# Altium PCB FPGA1394-QLA-Test.PcbDoc
Units mil, origin at the board's own origin, x right, y up, seen from the top; angles counter-clockwise.
Board outline 5000 x 5950 mil, 2 copper layers (Top Layer, Bottom Layer); 24 components, 62 nets, 220 pads, 7 vias.
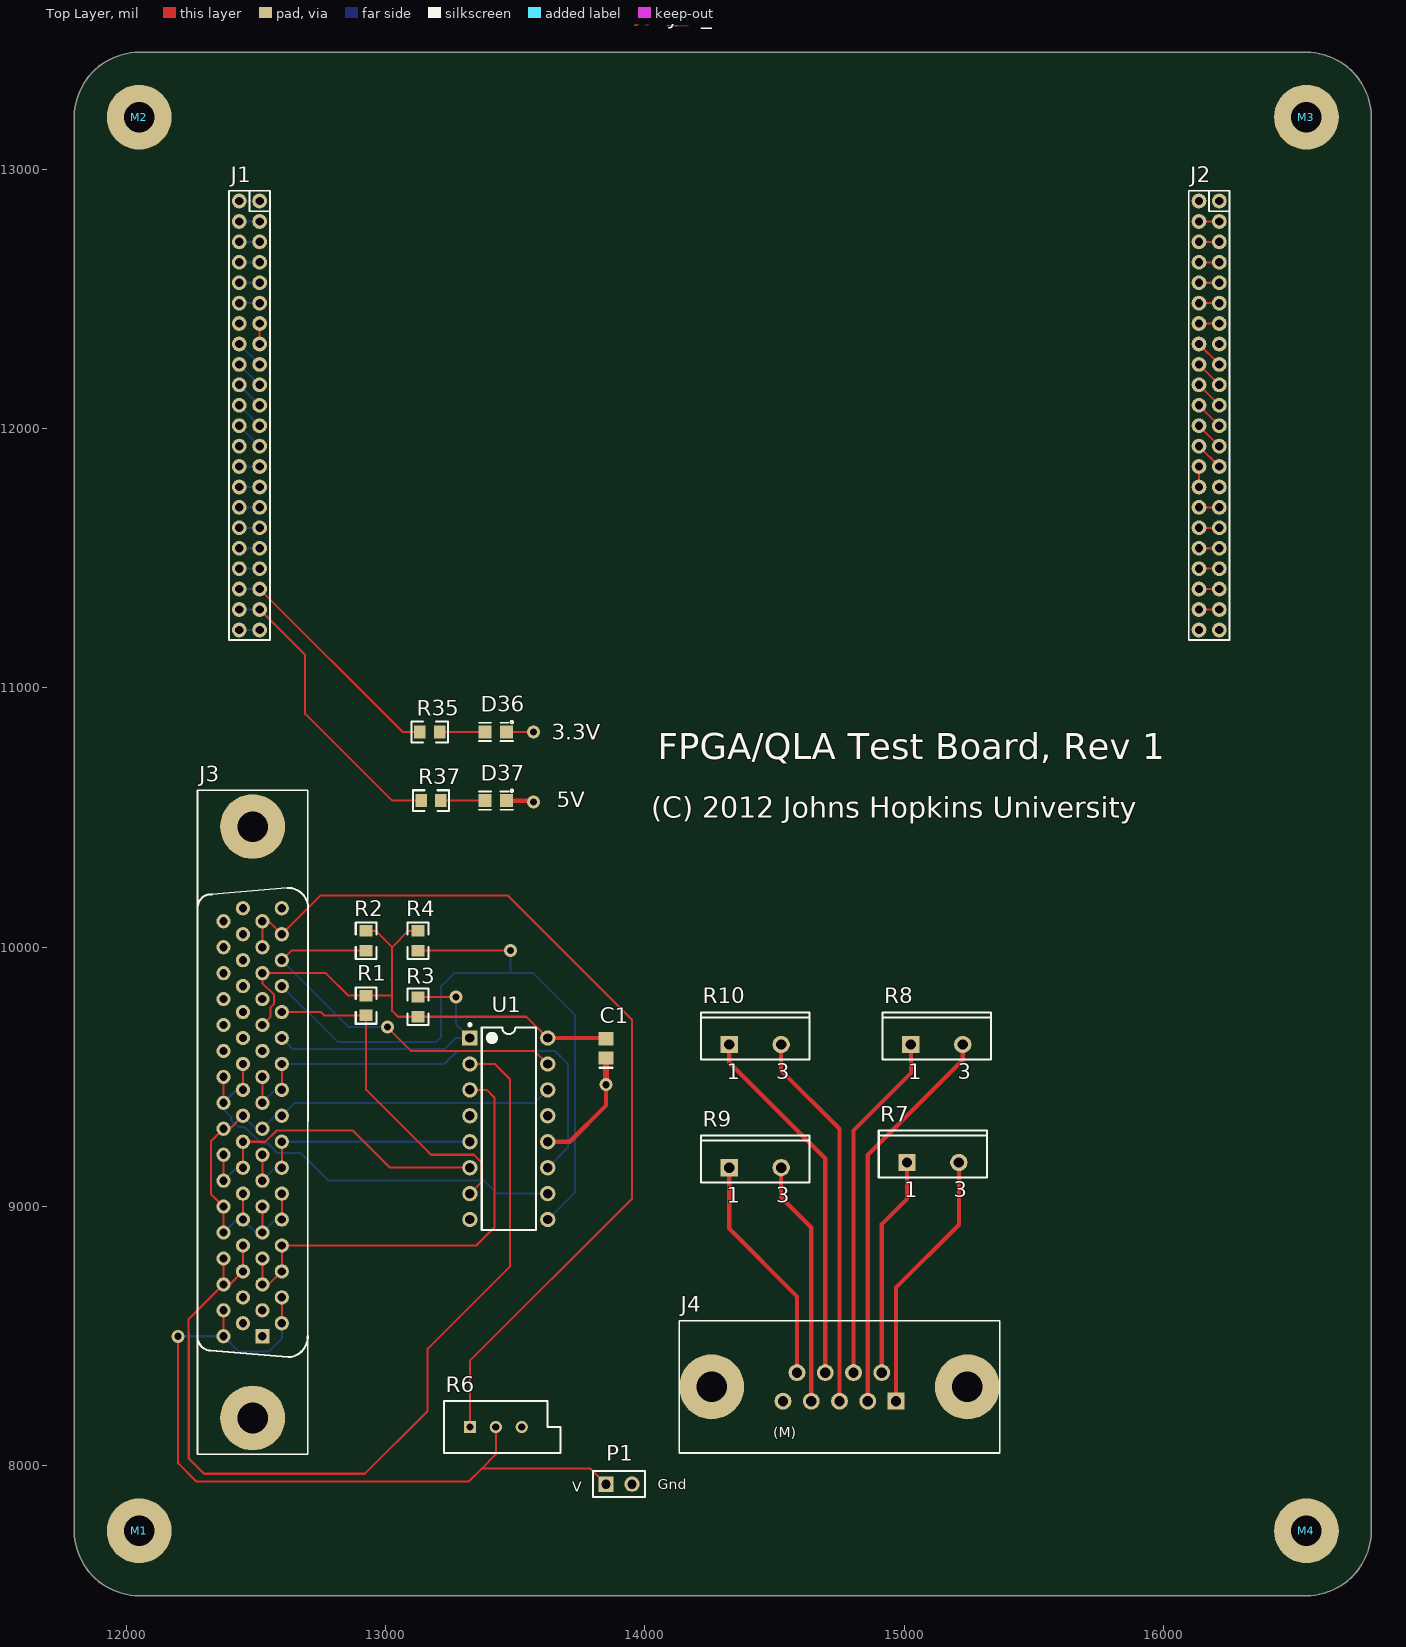
[diagram p0: Top Layer view]
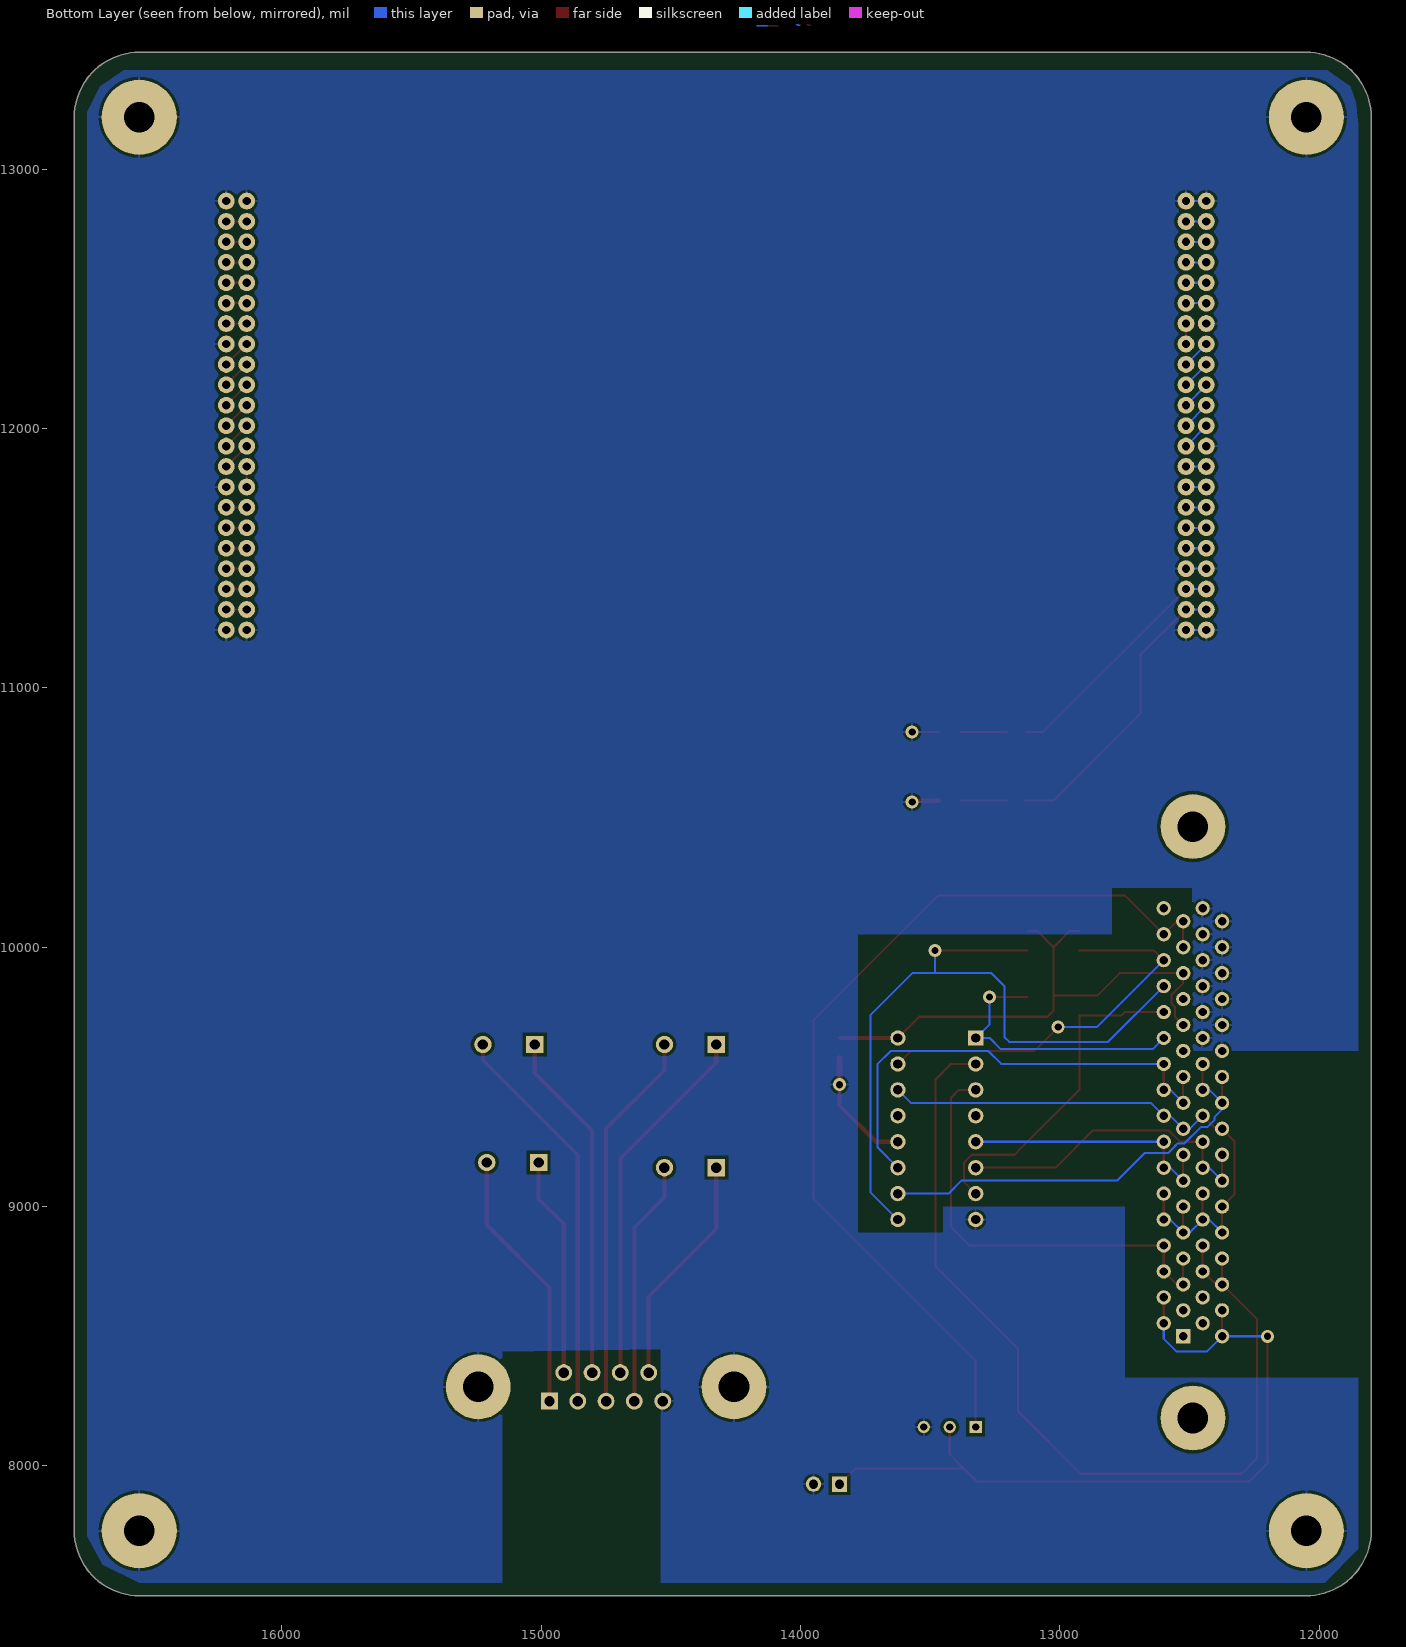
[diagram p1: Bottom Layer view, seen from below]

## Layer stack, top to bottom
Top Layer: signal copper 1.4
Dielectric: dielectric 12.6, FR-4, Dk 4.8
Bottom Layer: signal copper 1.4

## Board outline
11800,7750 ccw(c12050,7750) 12050,7500 16550,7500 ccw(c16550,7750) 16800,7750 16800,13200 ccw(c16550,13200) 16550,13450 12050,13450 ccw(c12050,13200) 11800,13200

## Design rules (kind name [scope] priority, off if disabled: settings)
Clearance [All] p1: gap=12
HoleSize [All] p1: absolutevalues=TRUE maxlimit=120 minlimit=1 maxpercent=80.000 minpercent=20.000
MinimumSolderMaskSliver [All] p1 off: minsoldermaskwidth=10
PolygonConnect [All] p1: connectstyle=Relief reliefconductorwidth=10 reliefentries=4 polygonreliefangle="90 Angle" airgapwidth=10
RoutingVias [All] p1: holewidth=28 width=50 viastyle="Through Hole" minholewidth=28 minwidth=50 maxholewidth=28 maxwidth=50
SilkscreenOverComponentPads [All] p1 off: minsilkscreentomaskgap=10
SolderMaskExpansion [All] p1: expansion=4
Width [All] p1: maxlimit=50 minlimit=8 preferedwidth=16
25 further rules are at their usual default settings.

## Classes and differential pairs
component class FPGA1394-Test: D36 D37 J1 J2 R35 R37
component class QLA-Test: C1 J3 J4 M1 M2 M3 M4 P1 R1 R2 R3 R4 R6 R7 R8 R9 R10 U1

## Components (designator, comment, footprint, x,y, rotation, side; value= is the part's Value field where it differs from the comment)
C1 "C0805" 0805 13850,9610 r90 top
D36 "LED" LED-0805 13425,10830 r180 top
D37 "LED" LED-0805 13425,10565 r180 top
J1 "HEADER 22x2-1" HDR-22x2-2MM 12475,12050 r270 top
J2 "HEADER 22x2-1" HDR-22x2-2MM 16175,12050 r270 top
J3 "HPDB68" HPDB68FV 12487.5,9325 r270 top
J4 "Motors (M)" DB9M 14750,8305 r0 top
M1 "MHOLE" MHOLE4 12050,7750 r0 top
M2 "MHOLE" MHOLE4 12050,13200 r0 top
M3 "MHOLE" MHOLE4 16550,13200 r0 top
M4 "MHOLE" MHOLE4 16550,7750 r0 top
P1 "Pot-Out" HDR1X2 13850,7930 r0 top
R1 "10k" R0805 12925,9775 r270 top
R2 "10k" R0805 12925,10025 r270 top
R3 "10k" R0805 13125,9770 r90 top
R4 "10k" R0805 13125,10025 r270 top
R6 "RPot" VR5 13425,8150 r0 top
R7 "50" TO-220AC 15110,9170 r0 top
R8 "50" TO-220AC 15125,9625 r0 top
R9 "50" TO-220AC 14425,9150 r0 top
R10 "50" TO-220AC 14425,9625 r0 top
R35 "200" R0805 13170,10830 r0 top
R37 "300" R0805 13175,10565 r0 top
U1 "DS96172CN" N16E 13475,9300 r0 top

## Footprints (in the part's own frame and the unit in brackets; to place one, negate y for a bottom-side part, rotate by r counter-clockwise, add the part's x,y. Pads: shape width x height; smd on the part's side, far side on the other; paste and mask are expansions set on the pad)
0805 [mm] "Chip Capacitor; Body 2.0 x 1.2 mm (LxW typ)"
  rect 1.3x1.5 smd: 1(-0.95,0) 2(0.95,0)
  silkscreen extent -1.9,-0.65 -1.9,0.65
DB9M [mil]
  rect 65x65 hole 40: 1(218,-55)
  round 65 hole 40: 2(109,-55) 3(0,-55) 4(-109,-55) 5(-218,-55) 6(163,55) 7(54,55) 8(-55,55) 9(-164,55)
  round 250 hole 118: 10(493,0) 11(-493,0)
  silkscreen extent -618,-255 618,255
HDR1X2 [mm] "Connector; Header; 2 Position"
  rect 1.5x1.5 hole 0.914: 1(0,0)
  round 1.5 hole 0.914: 2(2.54,0)
  silkscreen extent -1.27,-1.27 3.81,1.27
HDR-22x2-2MM [mil]
  round 57 / inner round 52 / far side round 65 hole 32: 1(-826.77,39.37) 2(-826.77,-39.37) 3(-748.03,39.37) 4(-748.03,-39.37) 5(-669.29,39.37) 6(-669.29,-39.37) 7(-590.55,39.37) 8(-590.55,-39.37) 9(-511.81,39.37) 10(-511.81,-39.37) 11(-433.07,39.37) 12(-433.07,-39.37) 13(-354.33,39.37) 14(-354.33,-39.37) 15(-275.59,39.37) 16(-275.59,-39.37) 17(-196.85,39.37) 18(-196.85,-39.37) 19(-118.11,39.37) 20(-118.11,-39.37) 21(-39.37,39.37) 22(-39.37,-39.37) 23(39.37,39.37) 24(39.37,-39.37) 25(118.11,39.37) 26(118.11,-39.37) 27(196.85,39.37) 28(196.85,-39.37) 29(275.59,39.37) 30(275.59,-39.37) 31(354.33,39.37) 32(354.33,-39.37) 33(433.07,39.37) 34(433.07,-39.37) 35(511.81,39.37) 36(511.81,-39.37) 37(590.55,39.37) 38(590.55,-39.37) 39(669.29,39.37) 40(669.29,-39.37) 41(748.03,39.37) 42(748.03,-39.37) 43(826.77,39.37) 44(826.77,-39.37)
  silkscreen extent -866,-79 866,79
HPDB68FV [mil]
  rect 55x55 hole 32: 1(825,37.5)
  round 55 hole 32: 2(775,112.5) 3(725,37.5) 4(675,112.5) 5(625,37.5) 6(575,112.5) 7(525,37.5) 8(475,112.5) 9(425,37.5) 10(375,112.5) 11(325,37.5) 12(275,112.5) 13(225,37.5) 14(175,112.5) 15(125,37.5) 16(75,112.5) 17(25,37.5) 18(-25,112.5) 19(-75,37.5) 20(-125,112.5) 21(-175,37.5) 22(-225,112.5) 23(-275,37.5) 24(-325,112.5) 25(-375,37.5) 26(-425,112.5) 27(-475,37.5) 28(-525,112.5) 29(-575,37.5) 30(-625,112.5) 31(-675,37.5) 32(-725,112.5) 33(-775,37.5) 34(-825,112.5) 35(825,-112.5) 36(775,-37.5) 37(725,-112.5) 38(675,-37.5) 39(625,-112.5) 40(575,-37.5) 41(525,-112.5) 42(475,-37.5) 43(425,-112.5) 44(375,-37.5) 45(325,-112.5) 46(275,-37.5) 47(225,-112.5) 48(175,-37.5) 49(125,-112.5) 50(75,-37.5) 51(25,-112.5) 52(-25,-37.5) 53(-75,-112.5) 54(-125,-37.5) 55(-175,-112.5) 56(-225,-37.5) 57(-275,-112.5) 58(-325,-37.5) 59(-375,-112.5) 60(-425,-37.5) 61(-475,-112.5) 62(-525,-37.5) 63(-575,-112.5) 64(-625,-37.5) 65(-675,-112.5) 66(-725,-37.5) 67(-775,-112.5) 68(-825,-37.5)
  round 250 hole 118: 69(1140,0) 70(-1140,0)
  silkscreen extent -1280,-213 1280,213
LED-0805 [mil]
  rect 50x50 smd mask+2: 1(-42,0) 2(42,0)
  silkscreen extent -67,-43 66,35
MHOLE4 [mil]
  round 250 / inner round 170 / far side round 290 hole 118: 1(0,0)
N16E [mm] "DIP, 16-Leads, Row Spacing 7.62mm, Pitch 2.54mm, Body 19.3x6.35mm"
  rect 1.5x1.5 hole 0.914: 1(-3.81,8.89)
  round 1.5 hole 0.914: 2(-3.81,6.35) 3(-3.81,3.81) 4(-3.81,1.27) 5(-3.81,-1.27) 6(-3.81,-3.81) 7(-3.81,-6.35) 8(-3.81,-8.89) 9(3.81,-8.89) 10(3.81,-6.35) 11(3.81,-3.81) 12(3.81,-1.27) 13(3.81,1.27) 14(3.81,3.81) 15(3.81,6.35) 16(3.81,8.89)
  silkscreen extent -3.93,-9.9 2.65,10.31, body extent -3.3,-9.9 3.3,9.9, height 4.32
R0805 [mil]
  rect 44x50 smd: 1(-38,0) 2(38,0)
  silkscreen extent -70,-40 70,40
TO-220AC [mm] "TO, Thru-Hole, Vertical, Heatsink Mounted; 3 In-Line Leads (1 Absent); Pitch 2.54 mm"
  rect 1.7x1.7 hole 1.016: 1(-2.54,0)
  round 1.7 hole 1.016: 3(2.54,0)
  silkscreen extent -5.3,-1.45 5.3,3.15
VR5 [mm] "Thru-Hole; 3 Leads"
  rect 1.2x1.2 hole 0.711: 1(-2.54,0)
  round 1.2 hole 0.711: 2(0,0) 3(2.54,0)
  silkscreen extent -5.08,-2.54 6.35,2.54

## Part data
C1: "Ceramic Chip Capacitor - Standard"
J3: "Half Pitch D-Sub 68Pin"
J4: library part "D Connector 9_1", "Receptacle Assembly, 9 Position, Right Angle"
M1 M2 M3 M4: "Mounting Hole"
P1: library part "Header 2", "Header, 2-Pin"
R1 R2 R3 R4 R7 R8 R9 R10: library part R
R6: "Potentiometer"
R35 R37: library part R-MINI
U1: library part DS96174CN, "RS-485/RS-422 Quad Differential Line Driver, 16-pin MDIP"

## Via types
v1: diameter 50, hole 28, Top Layer to Bottom Layer, tented both sides, 7 vias

## Nets (pads, with @x,y where several pads share a name; then routed paths per layer and width w, separated by ;. In a path a pad name is that pad's centre, name@x,y a point inside that pad or via, vN(x,y) a via of type N, cw(c..) or ccw(c..) an arc to the next point about the centre after c; other vN are vias at no path point)
3.3V-OUT: J1.39 J1.40 R35.1 | length 924.5
  Top Layer w8: J1.39 13065.08,10830 R35.1
  Bottom Layer w8: J1.40 J1.39
5V-OUT: J1.41 J1.42 R37.1 | length 1139.2
  Top Layer w8: J1.41 12690,11126.34 12690,10900 13025,10565 R37.1
  Bottom Layer w8: J1.42 J1.41
ENCA+: J3.39 J3.40 J3.41 J3.42 U1.2 | length 3658.3
  Top Layer w8: J3.41 J3.39 ; J3.42 J3.40 12400,8700 J3.39 ; U1.2 13420,9550 13480,9490 13480,8770 13162,8452 13162,8212 12920,7970 12300,7970 12241,8029 12241,8516.98 12240,8517.98 12240,8565 J3.39
ENCA-: J3.5 J3.6 J3.7 J3.8 U1.3 | length 1752.1
  Top Layer w8: J3.7 J3.5 12550,8700 J3.6 J3.8 13350,8850 13420,8920 13420,9420 13390,9450 U1.3
ENCB+: J3.47 J3.48 J3.49 J3.50 U1.6 | length 1248.2
  Top Layer w8: J3.47 J3.49 ; J3.48 J3.50 12536.52,9250 12580.02,9293.5 12873.5,9293.5 13017,9150 U1.6
  Bottom Layer w8: J3.47 12425,9150 J3.48
ENCB-: J3.13 J3.14 J3.15 J3.16 U1.5 | length 1020.7
  Top Layer w8: J3.13 J3.15 ; J3.14 J3.16
  Bottom Layer w8: J3.13 12575,9150 J3.14 ; J3.16 U1.5
ENCI+: J3.53 J3.54 J3.55 J3.56 U1.10 | length 1713
  Top Layer w8: J3.53 J3.55 ; J3.54 J3.56
  Bottom Layer w8: J3.54 12425,9450 J3.53 12375,9375 12405,9345 12405,9333.48 12431.98,9306.5 12456.98,9306.5 12519.98,9243.5 12546.5,9243.5 12556.5,9233.5 12556.5,9231.98 12581.98,9206.5 12673.5,9206.5 12780,9100 13380,9100 13430,9050 U1.10
ENCI-: J3.19 J3.20 J3.21 J3.22 U1.11 | length 1872.4
  Top Layer w8: J3.19 J3.21 ; J3.20 J3.22
  Bottom Layer w8: J3.19 12575,9450 J3.20 ; J3.22 13227.16,9550 13277.16,9600 13653,9600 13703,9550 13703,9228 U1.11
GND: C1.1 D36.1 D37.1 J1.1 J1.2 J1.14 J1.26 J1.37 J1.38 J1.43 J1.44 J2.1 J2.2 J2.15 J2.29 J2.43 J2.44 J3.57 J3.58 J3.59 J3.60 J3.61 J3.62 J3.63 J3.64 J3.65 J3.66 J3.67 J3.68 J4.5 J4.10 J4.11 M1.1 M2.1 M3.1 M4.1 P1.2 R6.3 U1.8 U1.12 | length 987.7
  Top Layer w8: D36.1 v1(13570,10830) ; J4.11 J4.11@14312,8250
  Top Layer w16: U1.12 13710,9250 13850,9390 v1(13850,9470)
  Top Layer w18: D37.1 13565,10565 v1(13570,10560)
  Top Layer w24: v1(13850,9470) C1.1
  Bottom Layer w8: J1.44 J1.43 ; J1.38 J1.37 ; J1.2 J1.1
IO1-1: J1.3 J1.4 | length 78.7
  Bottom Layer w8: J1.4 J1.3
IO1-3: J1.5 J1.6 | length 78.7
  Bottom Layer w8: J1.6 J1.5
IO1-5: J1.7 J1.8 | length 78.7
  Bottom Layer w8: J1.8 J1.7
IO1-7: J1.9 J1.10 | length 78.7
  Bottom Layer w8: J1.10 J1.9
IO1-9: J1.11 J1.12 | length 78.7
  Bottom Layer w8: J1.12 J1.11
IO1-11: J1.13 J1.15 | length 78.7
  Top Layer w8: J1.15 J1.13
IO1-13: J1.16 J1.17 | length 111.7
  Bottom Layer w8: J1.16 12435.63,12324.96 12513.74,12246.85 J1.17
IO1-15: J1.18 J1.19 | length 111.7
  Bottom Layer w8: J1.18 12435.63,12246.22 12513.74,12168.11 J1.19
IO1-17: J1.20 J1.21 | length 111.7
  Bottom Layer w8: J1.20 12435.63,12167.48 12513.74,12089.37 J1.21
IO1-19: J1.22 J1.23 | length 111.7
  Bottom Layer w8: J1.22 12435.63,12088.74 12513.74,12010.63 J1.23
IO1-21: J1.24 J1.25 | length 111.7
  Bottom Layer w8: J1.24 12435.63,12010 12513.74,11931.89 J1.25
IO1-23: J1.27 J1.28 | length 78.7
  Bottom Layer w8: J1.28@12435.63,11853.15 J1.27@12514.37,11853.15
IO1-25: J1.29 J1.30 | length 78.7
  Bottom Layer w8: J1.30 J1.29
IO1-27: J1.31 J1.32 | length 78.7
  Bottom Layer w8: J1.32 J1.31
IO1-29: J1.33 J1.34 | length 78.7
  Bottom Layer w8: J1.34 J1.33
IO1-31: J1.35 J1.36 | length 78.7
  Bottom Layer w8: J1.36 J1.35
IO2-1: J2.3 J2.4 | length 78.7
  Top Layer w8: J2.4 J2.3
IO2-3: J2.5 J2.6 | length 78.7
  Top Layer w8: J2.6 J2.5
IO2-5: J2.7 J2.8 | length 78.7
  Top Layer w8: J2.8 J2.7
IO2-7: J2.9 J2.10 | length 78.7
  Top Layer w8: J2.10 J2.9
IO2-9: J2.11 J2.12 | length 78.7
  Top Layer w8: J2.12 J2.11
IO2-11: J2.13 J2.14 | length 78.7
  Top Layer w8: J2.14 J2.13
IO2-13: J2.16 J2.17 | length 111.4
  Top Layer w8: J2.16 J2.17
IO2-15: J2.18 J2.19 | length 111.4
  Top Layer w8: J2.18 J2.19
IO2-17: J2.20 J2.21 | length 111.4
  Top Layer w8: J2.20 J2.21
IO2-19: J2.22 J2.23 | length 111.4
  Top Layer w8: J2.22 J2.23
IO2-21: J2.24 J2.25 | length 111.4
  Top Layer w8: J2.24 J2.25
IO2-23: J2.26 J2.27 | length 111.4
  Top Layer w8: J2.26 J2.27@16214.37,11853.15
IO2-25: J2.28 J2.30 | length 78.7
  Top Layer w8: J2.30 J2.28@16135.63,11853.15
IO2-27: J2.31 J2.32 | length 78.7
  Top Layer w8: J2.32 J2.31
IO2-29: J2.33 J2.34 | length 78.7
  Top Layer w8: J2.34 J2.33
IO2-31: J2.35 J2.36 | length 78.7
  Top Layer w8: J2.36 J2.35
IO2-33: J2.37 J2.38 | length 78.7
  Top Layer w8: J2.38 J2.37
IO2-35: J2.39 J2.40 | length 78.7
  Top Layer w8: J2.40 J2.39
IO2-37: J2.41 J2.42 | length 78.7
  Top Layer w8: J2.42 J2.41
LIM: J3.9 J3.10 J3.11 J3.12 J3.17 J3.18 J3.43 J3.44 J3.45 J3.46 J3.51 J3.52 U1.14 | length 2405.4
  Top Layer w8: J3.43 J3.45 12327,9048 12327,9252 J3.51 12400,9300 J3.52 ; J3.44 J3.46 ; J3.9 J3.11 ; J3.10 J3.12
  Bottom Layer w8: J3.43 12425,8950 J3.44 12500,8900 J3.9 12575,8950 J3.10 ; J3.52@12425,9350 J3.52 12500,9300 J3.17 12575,9350 J3.18 12650,9400 13575,9400 U1.14
NetD36_2: D36.2 R35.2 | length 178
  Top Layer w8: R35.2@13205,10830 D36.2
NetD37_2: D37.2 R37.2 | length 178
  Top Layer w8: R37.2@13205,10565 D37.2
NetJ3_2: J3.2 J3.4 J3.35 J3.37 P1.1 R6.2 | length 3101.5
  Top Layer w8: v1(12200,8500) 12200,8010 12270,7940 13320,7940 13370,7990 ; J3.35 J3.37 ; J3.2 J3.4 ; R6.2 13425,8045 13370,7990 ; P1.1 13790,7990 13370,7990
  Bottom Layer w8: v1(12200,8500) J3.35 12434,8441 12550,8441 12600,8491 J3.2
NetJ3_24: J3.24 R3.2 U1.1 | length 1087.3
  Top Layer w8: R3.2 v1(13271.54,9808)
  Bottom Layer w8: J3.24 12643,9607 13227.83,9607 13270.83,9650 U1.1 13271.54,9703.46 v1(13271.54,9808)
NetJ3_26: J3.26 R1.2 U1.7 | length 1317.4
  Top Layer w8: J3.26 12750,9750 12763,9737 R1.2 12925,9450 13145,9230 13175,9200 13339.91,9200 13370.53,9169.39 13370.53,9095.53 U1.7
NetJ3_28: J3.28 R4.2 U1.9 | length 2789.1
  Top Layer w8: R4.2 v1(13482,9987)
  Bottom Layer w8: J3.28 12815,9635 13196,9635 13214,9653 13214,9850 13264,9900 13480,9900 ; v1(13482,9987) 13482,9902 13480,9900 ; U1.9 13731,9056 13731,9738 13569,9900 13480,9900
NetJ3_30: J3.30 R2.2 U1.15 | length 1531
  Top Layer w8: J3.30 12637,9987 R2.2 ; v1(13007,9692) 13099.47,9599.53 13575.47,9599.53 U1.15
  Bottom Layer w8: J3.30 12858,9692 v1(13007,9692)
NetJ4_1: J4.1 R7.3 | length 1020.2
  Top Layer w16: J4.1 14968,8688 15210,8930 R7.3
NetJ4_2: J4.2 R8.3 | length 1526.6
  Top Layer w16: J4.2 14859,9199 15225,9565 R8.3
NetJ4_3: J4.3 R10.3 | length 1468.2
  Top Layer w16: R10.3 14525,9525 14750,9300 J4.3
NetJ4_4: J4.4 R9.3 | length 948
  Top Layer w16: R9.3 14525,9036 14641,8920 J4.4
NetJ4_6: J4.6 R7.1 | length 850.2
  Top Layer w16: J4.6 14913,8933 15010,9030 R7.1
NetJ4_7: J4.7 R8.1 | length 1356.5
  Top Layer w16: J4.7 14804,9294 15025,9515 R8.1
NetJ4_8: J4.8 R10.1 | length 1418.3
  Top Layer w16: R10.1 14325,9555 14695,9185 J4.8
NetJ4_9: J4.9 R9.1 | length 898.1
  Top Layer w16: R9.1 14325,8915 14586,8654 J4.9
VCC: C1.2 J3.25 J3.29 R1.1 R2.1 R3.1 R4.1 U1.16 | length 2141.3
  Top Layer w8: J3.25 12556.5,9731.5 12556.5,9768.02 12570,9781.52 12570,9816.52 12525,9861.52 J3.29 12770,9900 12857,9813 R1.1 13022,9813 13025,9810 ; R2.1 12962,10063 13025,10000 ; R4.1 13088,10063 13025,10000 ; U1.16 13543,9732 R3.1 13048,9732 13025,9755 13025,9810 ; C1.2@13847.4,9650 C1.2 ; 13025,9810 13025,10000
  Top Layer w16: U1.16 C1.2@13847.4,9650
VPP: J3.31 J3.32 J3.33 R6.1 | length 3660.5
  Top Layer w8: J3.31 J3.33 12550,10100 J3.32 12750,10200 13470,10200 13950,9720 13950,9030 13325,8405 R6.1
  Bottom Layer w8: J3.32@12575,10050 J3.32
pads on no net: J3.1 J3.3 J3.23 J3.27 J3.34 J3.36 J3.38 J3.69 J3.70 U1.4 U1.13

## Polygon pours and split planes (outlines as drawn)
GND on Bottom Layer "GND" (solid, remove dead copper, pour order 2): 11970,13380 16610,13380 16700,13320 16750,13220 16750,7730 16690,7620 16550,7550 15150,7550 15150,8440 14540,8450 14540,7550 11980,7550 11850,7680 11850,8340 12750,8340 12750,9000 13450,9000 13450,8900 13780,8900 13780,10050 12800,10050 12800,10230 12490,10230 12490,9600 11850,9600 11850,13170 11860,13260 11880,13320

## Keep-outs
Mechanical 1:
  lines w0: 11800,7750 ccw(c12050,7750) 12050,7500 ; 16550,7500 ccw(c16550,7750) 16800,7750

## Other copper
Top Layer:
  text ".Layer_Name" at 13830,13570 h60
Bottom Layer:
  text ".Layer_Name" at 13870,13570 h60

## Silkscreen, mask and mechanical layers (free items; w line width, h text height)
Top Overlay:
  text ".Layer_Name" at 13960,13560 h60
  text "3.3V" at 13640,10800 h60
  text "FPGA/QLA Test Board, Rev 1" at 14050,10725 h100
  text "5V" at 13660,10540 h60
  text "(C) 2012 Johns Hopkins University" at 14025,10500 h80
  text "Gnd" at 14050,7910 h40
  text "V" at 13720,7900 h40
Mechanical 1:
  lines w0: 11800,7750 11800,13200 cw(c12050,13200) 12050,13450 16550,13450 cw(c16550,13200) 16800,13200 16800,7750 ; 12050,7500 16550,7500

## Text inside footprints (layer, text, board x,y; h text height)
J4: Top Overlay "(M)" at 14495,8110 h40
R7: Top Overlay "3" at 15190.32,9035.16 h59.06; Top Overlay "1" at 15000.16,9035.16 h59.06
R8: Top Overlay "3" at 15205.32,9490.16 h59.06; Top Overlay "1" at 15015.16,9490.16 h59.06
R9: Top Overlay "3" at 14505.32,9015.16 h59.06; Top Overlay "1" at 14315.16,9015.16 h59.06
R10: Top Overlay "3" at 14505.32,9490.16 h59.06; Top Overlay "1" at 14315.16,9490.16 h59.06